# Altium PCB 5VBoost.PcbDoc
Units mil, origin at the board's own origin, x right, y up, seen from the top; angles counter-clockwise.
Board outline 1210 x 910 mil, 2 copper layers (Top Layer, Bottom Layer); 13 components, 7 nets, 54 pads, 14 vias.
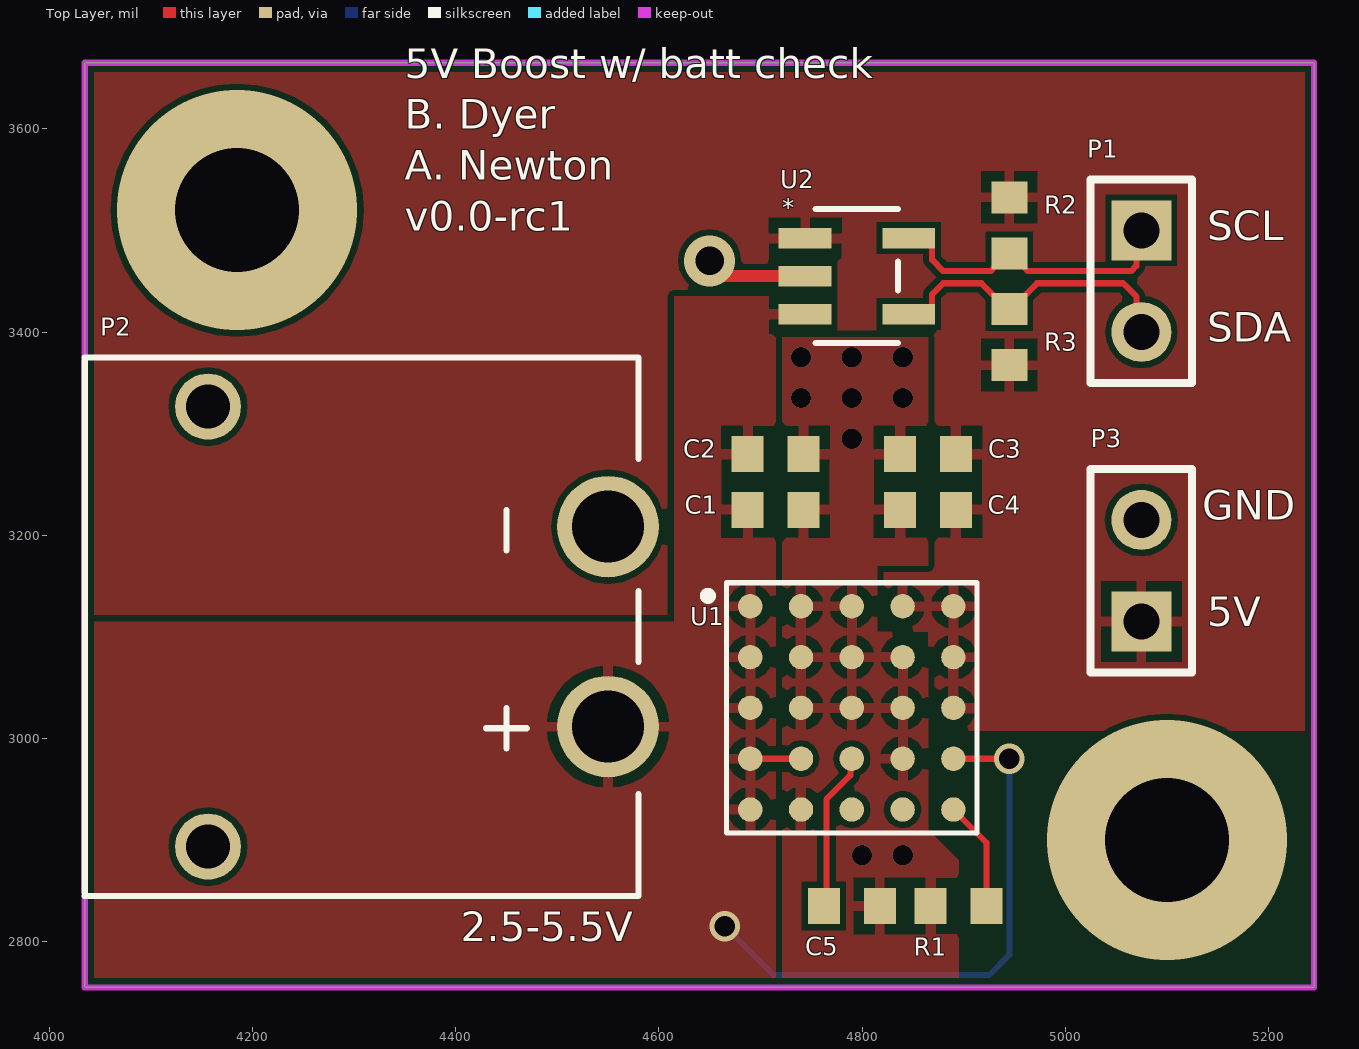
[diagram p0: Top Layer view]
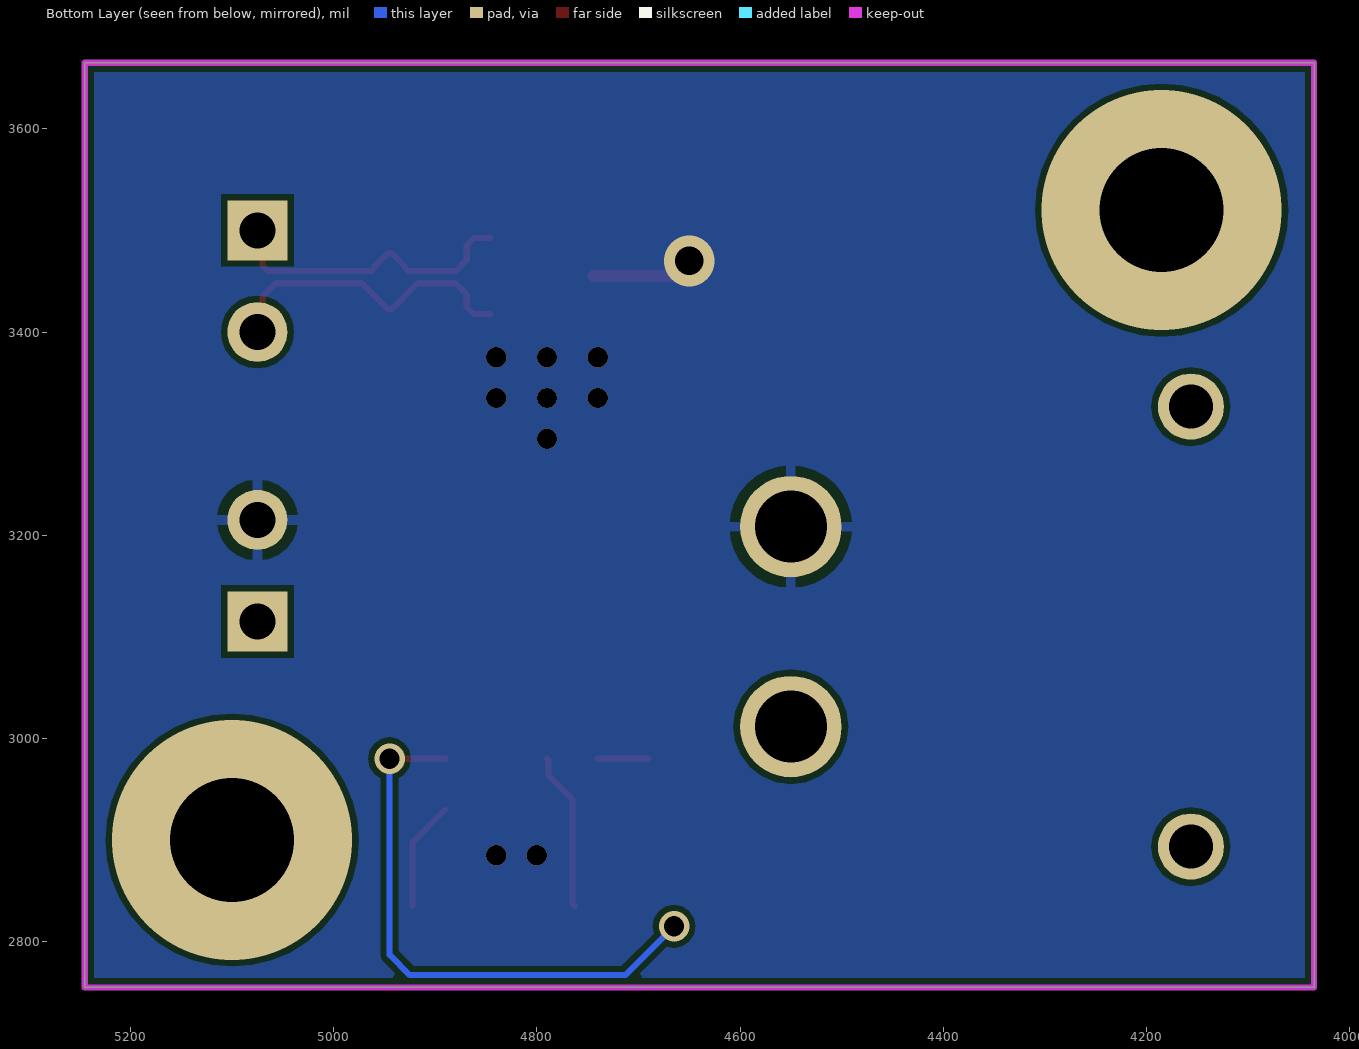
[diagram p1: Bottom Layer view, seen from below]

## Layer stack, top to bottom
Top Solder: solder mask 0.4, Solder Resist, Dk 3.5
Top Layer: signal copper 1.4
Dielectric 1: dielectric 12.6, FR-4, Dk 4.8
Bottom Layer: signal copper 1.4
Bottom Solder: solder mask 0.4, Solder Resist, Dk 3.5

## Board outline
4035,2755 4035,3665 5245,3665 5245,2755

## Design rules (kind name [scope] priority, off if disabled: settings)
Clearance [All] p1: gap=6 ignorepadtopadclearanceinfootprint=FALSE
PolygonConnect [All] p1: thpad.connectstyle=Relief thpad.reliefconductorwidth=10 thpad.reliefentries=4 thpad.polygonreliefangle="90 Angle" thpad.airgapwidth=10 smdpad.connectstyle=Relief smdpad.reliefconductorwidth=10 smdpad.reliefentries=4 smdpad.polygonreliefangle="90 Angle" smdpad.airgapwidth=10 via.connectstyle=Direct via.reliefconductorwidth=10 via.reliefentries=4 via.polygonreliefangle="90 Angle" via.airgapwidth=10
RoutingVias [All] p1: holewidth=28 width=50 viastyle="Through Hole" minholewidth=12 minwidth=18 maxholewidth=1000 maxwidth=1000
SolderMaskExpansion [All] p1: expansion=4 istentingtop=FALSE
Width [All] p1: maxlimit=12 minlimit=6 preferedwidth=6 minimp=50.000000 maximp=50.000000 favimp=50.000000
30 further rules are at their usual default settings.

## Components (designator, comment, footprint, x,y, rotation, side; value= is the part's Value field where it differs from the comment)
C1 "22uF" 1608[0603] 4715,3225 r180 top value=6.3V
C2 "22uF" 1608[0603] 4715,3280 r180 top value=6.3V
C3 "22uF" 1608[0603] 4865,3280 r0 top value=16V
C4 "22uF" 1608[0603] 4865,3225 r0 top value=16V
C5 "22uF" 1608[0603] 4790,2835 r0 top value=6.3V
P1 "12C bus" HDR1X2 5075,3500 r270 top
P2 "Battery Power" "xt30 right angle" 4550,3110 r90 top
P3 "5V bus" HDR1X2 5075,3115 r90 top
R1 "31.6k" 1608[0603] 4895,2835 r0 top
R2 "10k" 1608[0603] 4945,3505 r90 top
R3 "10k" 1608[0603] 4945,3395 r270 top
U1 "LTM4661IY#PBF" BGA25C127P5X5_625X625X262N 4790,3030 r0 top
U2 "MCP3021A3T-E/OT" SOT-23-5_MC_MCH 4795,3455 r0 top

## Footprints (in the part's own frame and the unit in brackets; to place one, negate y for a bottom-side part, rotate by r counter-clockwise, add the part's x,y. Pads: shape width x height; smd on the part's side, far side on the other; paste and mask are expansions set on the pad)
1608[0603] [mm] "Chip Capacitor, Body 1.6x0.8mm, IPC High Density"
  rect 0.8x0.9 smd: 1(-0.7,0) 2(0.7,0)
  body extent -0.87,-0.48 0.87,0.48, height 1.3
BGA25C127P5X5_625X625X262N [mm]
  round 0.61 smd: A1(-2.54,2.54) A2(-1.27,2.54) A3(0,2.54) A4(1.27,2.54) A5(2.54,2.54) B1(-2.54,1.27) B2(-1.27,1.27) B3(0,1.27) B4(1.27,1.27) B5(2.54,1.27) C1(-2.54,0) C2(-1.27,0) C3(0,0) C4(1.27,0) C5(2.54,0) D1(-2.54,-1.27) D2(-1.27,-1.27) D3(0,-1.27) D4(1.27,-1.27) D5(2.54,-1.27) E1(-2.54,-2.54) E2(-1.27,-2.54) E3(0,-2.54) E4(1.27,-2.54) E5(2.54,-2.54)
  silkscreen extent -3.7,-3.13 3.13,3.13
HDR1X2 [mm] "Connector; Header; 2 Position"
  rect 1.5x1.5 hole 0.9: 1(0,0)
  round 1.5 hole 0.9: 2(2.54,0)
  silkscreen extent -1.27,-1.27 3.81,1.27
SOT-23-5_MC_MCH [mil]
  rect 52x20 smd paste+0 mask+0: 1(-51,37.4) 2(-51,0) 3(-51,-37.4) 4(51,-37.4) 5(51,37.4)
  silkscreen extent -40,-66 40,66, body extent 0,0 10,10, height 10
"xt30 right angle" [mm]
  round 2.54 hole 1.8: 1(2.5,0) 2(-2.5,0)
  round 1.651 hole 1.1: 3(5.5,10) 4(-5.5,10)
  silkscreen extent -6.73,-0.76 6.73,13.08

## Part data
C1 C2 C3 C4 C5: library part Cap, "Capacitor", LatestRevisionDate=17-Jul-2002, LatestRevisionNote="Re-released for DXP Platform.", PackageDescription="Radial Cap, Thru-Hole; 2 Leads; 0.3 in Pin Spacing", PackageReference=RAD-0.3, Published=8-Jun-2000, Publisher="Altium Limited"
P1 P2 P3: library part "Header 2", "Header, 2-Pin", LatestRevisionDate=17-Jul-2002, LatestRevisionNote="Re-released for DXP Platform.", Publisher="Altium Limited"
R1 R2 R3: library part Res1, "Resistor", LatestRevisionDate=17-Jul-2002, LatestRevisionNote="Re-released for DXP Platform.", PackageDescription="Axial Device, Thru-Hole; 2 Leads; 0.3 in Pin Spacing", PackageReference=AXIAL-0.3, Published=8-Jun-2000, Publisher="Altium Limited"
U1: "Conv DC-DC 0.7V to 5.5V Step Up Single-Out 2.5V to 15V 2A uModule 25-Pin BGA Tray", Package="BGA -25 Analog Devices", Supplier Part Number 1=LTM4661IY#PBF-ND, Availability=Unavailable, MF="Analog Devices", MP=LTM4661IY#PBF, Price=None, SnapEDA_Link=https://www.snapeda.com/parts/LTM4661IY%23PBF/Analog%20Devices/view-part/4341307/?ref=snap, Supplier 1=Digi-Key
U2: "No Description Available", Built_By=EMA_Jessica, Copyright="Copyright (C) 2018 Accelerated Designs. All rights reserved", Manufacturer_Part_Number=MCP3021A3T-E/OT, RefDes=RefDes, SourceLibrary=Microchip_2019-08-23_6, Type=DEV, Vendor=Microchip

## Via types
v1: diameter 20, hole 20, Top Layer to Bottom Layer, tented both sides, 9 vias
v2: diameter 30, hole 20, Top Layer to Bottom Layer, tented both sides, 2 vias
v3: diameter 236.22, hole 122.05, Top Layer to Bottom Layer, 2 vias
v4: diameter 50, hole 28, Top Layer to Bottom Layer, tented both sides, 1 vias

## Nets (pads, with @x,y where several pads share a name; then routed paths per layer and width w, separated by ;. In a path a pad name is that pad's centre, name@x,y a point inside that pad or via, vN(x,y) a via of type N, cw(c..) or ccw(c..) an arc to the next point about the centre after c; other vN are vias at no path point)
5V: C3.2 C4.2 P3.1 R2.2 R3.2 U1.A4 U1.A5 U1.B5 U1.C5 U2.1
GND: C1.1 C2.1 C3.1 C4.1 C5.2 P2.1 P3.2 R1.1 U1.A2 U1.A3 U1.B2 U1.B3 U1.B4 U1.C2 U1.C3 U1.C4 U1.D4 U1.E2 U2.2 | length 103.1
  Top Layer w12: v4(4650,3470) 4650,3465 4660,3455 U2.2
  other v1: 4800,2885 4840,2885 4790,3295 4740,3335 4790,3335 4840,3335 4740,3375 4790,3375 4840,3375
NetC5_1: C5.1 U1.D3 | length 156.4
  Top Layer w6: C5.1 4765,2837.56 4765,2940 4788.65,2963.65 4788.65,2978.65 U1.D3
NetR1_2: R1.2 U1.E5 | length 108.5
  Top Layer w6: U1.E5 4922.56,2897.44 R1.2
SCA: P1.2 R3.1 U2.4 | length 311.6
  Top Layer w6: U2.4 4862,3417.6 4869,3424.6 4869,3437 4880,3448 4917.59,3448 4943.03,3422.56 R3.1 4946.97,3422.56 4972.41,3448 5057,3448 5069.99,3435.01 5069.99,3424.51 5084.34,3410.15 P1.2@5094.85,3410.15
SCL: P1.1 R2.1 U2.5 | length 280.9
  Top Layer w6: U2.5 4862,3492.4 4869,3485.4 4869,3471 4880,3460 4926.77,3460 4930.28,3463.51 4930.28,3464.69 R2.1@4943.03,3477.44 ; R2.1 4946.97,3477.44 4959.72,3464.69 4959.72,3463.51 4963.23,3460 5065,3460 5069.99,3464.99 5069.99,3473.47 5071.51,3475 P1.1@5080,3475
VBatt: C1.2 C2.2 P2.2 U1.A1 U1.B1 U1.C1 U1.D1 U1.D2 U1.D5 U1.E1 U2.3 | length 606.2
  Top Layer w6: U1.D1 U1.D2 ; U1.D5 v2(4945,2980)
  Bottom Layer w6: v2(4665,2815) 4713,2767 4925,2767 4945,2787 v2(4945,2980)
pads on no net: P2.3 P2.4 U1.E3 U1.E4
copper on no net:
  other v3: 5100,2900 4185,3520

## Polygon pours and split planes (outlines as drawn)
5V on Top Layer "5V_L01_P002" (solid, pour order 2): 4615,3115 4615,3435 4715,3435 4775,3435 4775,3395 4865,3395 4865,3170 4815,3170 4815,3105 4865,3105 4865,3007.5 5245,3007.5 5245,3665 4035,3665 4035,3115
GND on Top Layer "GND_L01_P001" (solid, pour order 1): 4715,2925 4715,3395 4865,3395 4865,3170 4815,3170 4815,3105 4865,3105 4865,2910 4895,2880 4895,2755 4715,2755
VBatt on Top Layer "VBATT_Poly" (solid, pour order 0): 4035,2755 4035,3115 4615,3115 4615,3435 4715,3435 4775,3435 4775,3395 4715,3395 4715,2755
GND on Bottom Layer "GND_L02_P003" (solid, pour order 3): 4035,2755 4035,3665 5245,3665 5245,2755

## Keep-outs
Keep-Out Layer:
  the board outline again, w6

## Silkscreen, mask and mechanical layers (free items; w line width, h text height)
Top Overlay:
  text "5V Boost w/ batt check / B. Dyer / A. Newton / v0.0-rc1" at 4350,3490 h50
  text "SCL" at 5140,3480.55 h50
  text "SDA" at 5140,3380.55 h50
  text "GND" at 5135,3205.55 h50
  text "5V" at 5140,3100.55 h50
  text "2.5-5.5V" at 4404.95,2790.55 h50
Mechanical 7:
  lines w6: 4035,3115 4035,3665 4690,3665 5245,3665 5245,3007.5 4865,3007.5 4865,3105 ; 4035,3115 4035,2755 4715,2755 ; 4035,3115 4615,3115 4615,3435 4715,3435 ; 4715,2755 4895,2755 4895,2880 4865,2910 4865,3105 ; 4715,2755 4715,2925 4715,3395 4775,3395 ; 4715,3435 4775,3435 4775,3395 ; 4715,3435 4715,3435 ; 4775,3395 4865,3395 4865,3170 4815,3170 4815,3105 4865,3105

## Text inside footprints (layer, text, board x,y; h text height)
U2: Top Overlay "*" at 4721.5,3507.4 h30; Mechanical 13 "*" at 4757,3469.4 h30